# Altium PCB Rigid-QFN-1.PcbDoc (part 1 of 2)
Units mil, origin at the board's own origin, x right, y up, seen from the top; angles counter-clockwise.
Board outline 1000.01 x 1200 mil, 2 copper layers (Top Layer, Bottom Layer), stack 0.552 mil thick; 55 components, 23 nets, 162 pads, 82 vias.
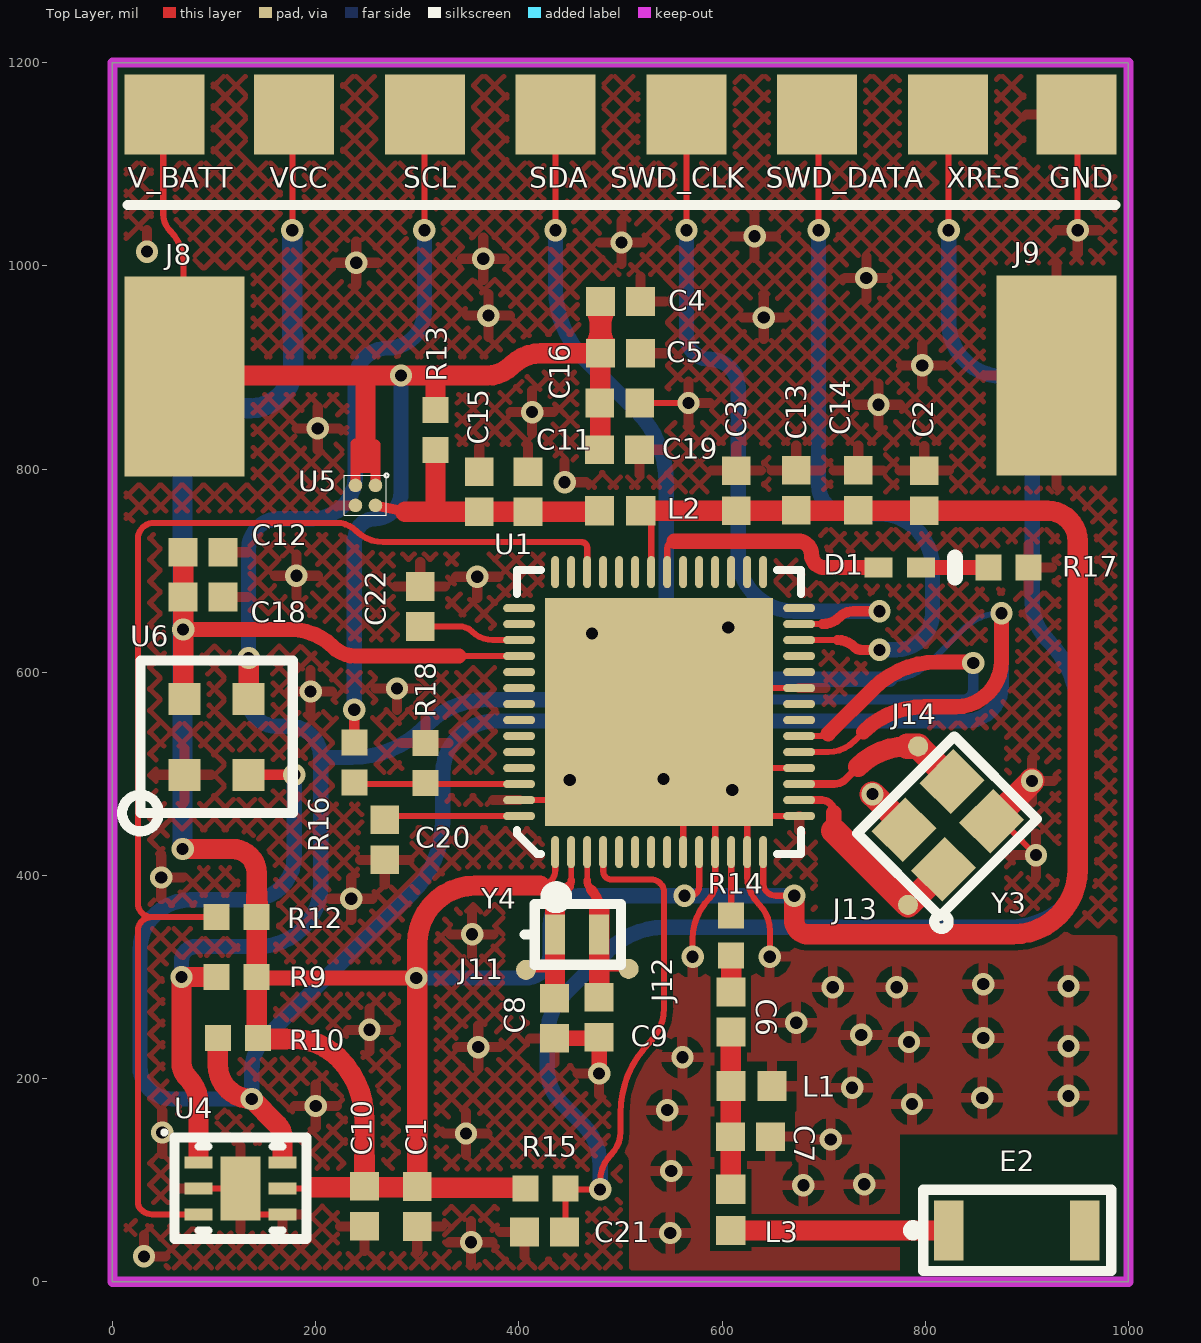
[diagram p0: Top Layer view]
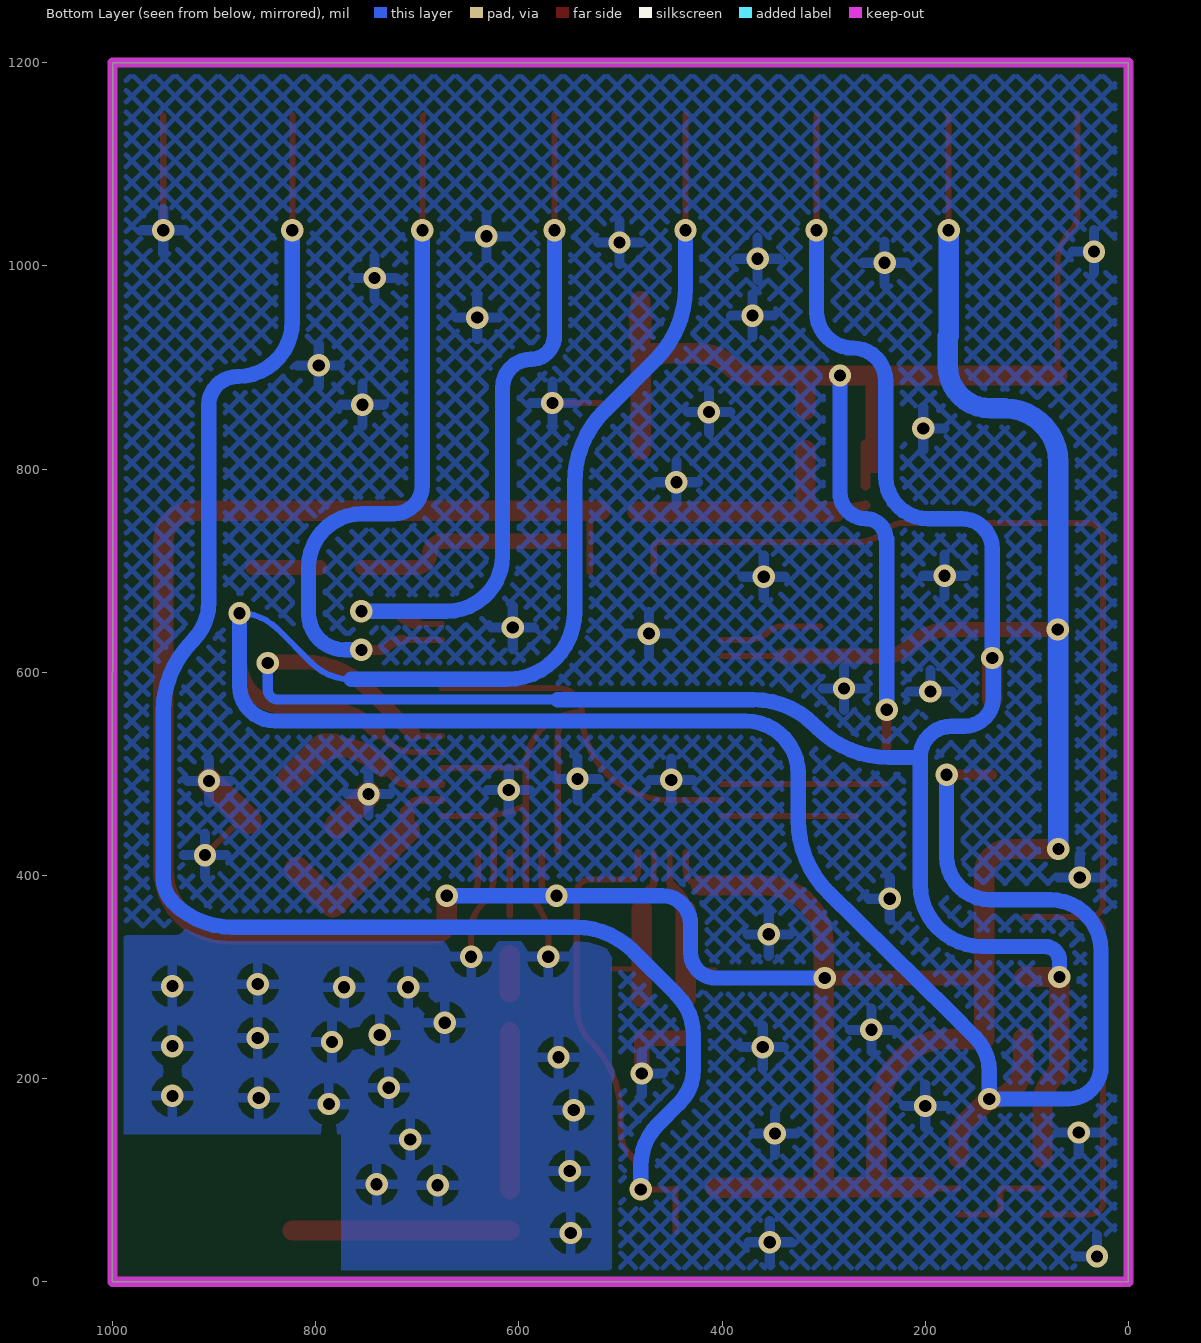
[diagram p1: Bottom Layer view, seen from below]

## Layer stack, top to bottom
Top Solder: solder mask 0.4, Solder Resist, Dk 3.5
Top Layer: signal copper 0.04
Dielectric1: dielectric 0.472, Polyimide, Dk 2.93
Bottom Layer: signal copper 0.04
Bottom Solder: solder mask 0.4, Solder Resist, Dk 3.5

## Board outline
0,0 1000.01,0 999.92,1200 0,1200

## Design rules (kind name [scope] priority, off if disabled: settings)
Clearance "pour clearance" [All] p1: gap=6 ignorepadtopadclearanceinfootprint=FALSE
Clearance [All] p2: gap=6 ignorepadtopadclearanceinfootprint=FALSE
ComponentClearance [All] p1: gap=5 collisioncheckmode=3 verticalgap=10 showdistances=FALSE
DiffPairsRouting [All] p1: maxlimit=10 minlimit=5 mostfreqgap=10 toplayer_minwidth=5 toplayer_maxwidth=35 toplayer_prefwidth=7.5 bottomlayer_minwidth=5 bottomlayer_maxwidth=35 bottomlayer_prefwidth=7.5 maxuncoupledlength=500
FabricationTestPointUsage TestPointUsage [All] p1: valid=0 allowmultiple=FALSE
FabricationTestpoint Testpoint [All] p1: side=3 testpointundercomponent=TRUE minsize=40 maxsize=100 preferedsize=60 minholesize=0 maxholesize=40 preferedholesize=32 testpointgrid=1 allowsidetop=TRUE allowsidebottom=TRUE usegrid=TRUE gridtolerance=0.01
HoleSize [All] p1: absolutevalues=TRUE maxlimit=100 minlimit=12 maxpercent=80.000 minpercent=20.000
HoleToHoleClearance [All] p1: gap=16 allowstackedmicrovias=TRUE
MinimumAnnularRing [All] p1: minimumring=5
MinimumSolderMaskSliver [All] p1: minsoldermaskwidth=4
PolygonConnect [All] p1: connectstyle=Relief reliefconductorwidth=10 reliefentries=4 polygonreliefangle="90 Angle" airgapwidth=10
RoutingCorners [All] p1: cornerstyle=45-Degree minsetback=5 maxsetback=30
RoutingVias [All] p1: holewidth=12 width=22 viastyle="Through Hole" minholewidth=6 minwidth=20 maxholewidth=28 maxwidth=25
SilkToSilkClearance [All] p1: silktosilkclearance=6
SilkToSolderMaskClearance SilkscreenOverComponentPads [IsPad] p1: minsilkscreentomaskgap=6 clearancetoexposedcopper=TRUE
SolderMaskExpansion [All] p1: expansion=3
UnRoutedNet [All] p1: checkbadconnections=TRUE
UnpouredPolygon [All] p1: allowshelved=TRUE
Width [All] p1: maxlimit=100 minlimit=6 preferedwidth=6 checkconnectedcopper=TRUE
18 further rules are at their usual default settings.

## Classes and differential pairs
differential pair XTAL_HF: +XTAL_HF_P -XTAL_HF_N
differential pair XTAL_LF: +XTAL_LF_P -XTAL_LF_N

## Components (designator, comment, footprint, x,y, rotation, side; value= is the part's Value field where it differs from the comment)
C1 "100nF" CAP_0402(1005)_M 300,74 r270 top
C2 "10uF" CAP_0402(1005)_M 799,778.68 r90 top
C3 "10uF" CAP_0402(1005)_M 614,778.68 r90 top
C4 "10uF" CAP_0402(1005)_M 500,965 r0 top
C5 "10uF" CAP_0402(1005)_M 500,914 r0 top
C6 "0.5pF" CAP_0402(1005)_M 608.65,265.45 r270 top
C7 "2pF" CAP_0402(1005)_M 628,142.69 r0 top
C8 "39pF" CAP_0402(1005)_M 435,259.32 r270 top
C9 "18pF" CAP_0402(1005)_M 479,260.32 r270 top
C10 "1uF" CAP_0402(1005)_M 248,74.28 r270 top
C11 "1uF" CAP_0402(1005)_M 409,777.68 r90 top
C12 "1uF" CAP_0402(1005)_M 89,718 r0 top
C13 "1uF" CAP_0402(1005)_M 673,779 r90 top
C14 "1uF" CAP_0402(1005)_M 734,779 r90 top
C15 "100nF" CAP_0402(1005)_M 361,777.68 r90 top
C16 "1uF" CAP_0402(1005)_M 499.31,865 r0 top
C18 "100nF" CAP_0402(1005)_M 89,674 r0 top
C19 "1uF" CAP_0402(1005)_M 499,819 r0 top
C20 "1uF" CAP_0402(1005)_M 268,435 r270 top
C21 "100pF" CAP_0402(1005)_M 425.31,49 r180 top
C22 "1uF" CAP_0402(1005)_M 303,664.68 r90 top
D1 "Red" LED_0402(1005) 774,703 r0 top
E2 "2450AT18B100" 2450AT18B100 823,50.69 r0 top
GND "Probe-Pin Pad" Pogo-Pin-Pad 949,1149 r90 top
J8 "Battery_Connector" BATTERY_PAD 71,891 r0 top
J9 "Battery_Connector" BATTERY_PAD 929,892 r0 top
J11 "Probe-CLOCK" POGO-CLOCK-PAD 407,307 r90 top
J12 "Probe-CLOCK" POGO-CLOCK-PAD 508,308 r90 top
J13 "Probe-CLOCK" POGO-CLOCK-PAD 783,371 r180 top
J14 "Probe-CLOCK" POGO-CLOCK-PAD 793,527 r0 top
L1 "2nh" IND_0402(1005)_M 629,192.69 r180 top
L2 "1uh" IND_0402(1005)_M 499.75,759 r0 top
L3 "9nh" IND_0402(1005)_M 608.65,70.77 r270 top
R9 "4.7kR" RES_0402(1005)_M 122.31,300 r0 top
R10 "4.7kR" RES_0402(1005)_M 123.31,240 r0 top
R12 "4.7kR" RES_0402(1005)_M 122.32,359 r180 top
R13 "0mR" RES_0402(1005)_M 318,838.32 r270 top
R14 "0mR" RES_0402(1005)_M 609,341 r270 top
R15 "4.7kR" RES_0402(1005)_M 426.31,92 r0 top
R16 "100kR" RES_0402(1005)_M 238,511 r270 top
R17 "270R" RES_0402(1005)_M 882,703 r0 top
R18 "30kR" RES_0402(1005)_M 308,510.68 r90 top
SCL "Probe-Pin Pad" Pogo-Pin-Pad 307.43,1149 r90 top
SDA "Probe-Pin Pad" Pogo-Pin-Pad 436.14,1149 r90 top
SWD_CLK "Probe-Pin Pad" Pogo-Pin-Pad 564.86,1149 r90 top
SWD_DATA "Probe-Pin Pad" Pogo-Pin-Pad 693.57,1149 r90 top
U1 "CY8C4247LQI-BL483" QFN40P700X700X60-57N 538.13,560.8 r90 top
U4 "TMP116" WSON-6 126,92 r0 top
U5 "ADP172" ADP172 249,774 r270 top locked
U6 "GUVB-C31SM" GUVB-C31SM 102.5,536.4 r180 top
V_BATT "Probe-Pin Pad" Pogo-Pin-Pad 51,1149 r90 top
VCC "Probe-Pin Pad" Pogo-Pin-Pad 178.71,1149 r90 top
XRES "Probe-Pin Pad" Pogo-Pin-Pad 822.29,1149 r90 top
Y3 "ECX-2236" ECX-2236 817.97,406.03 r45 top
Y4 "32.768KHz" ABS05 435.6,342 r0 top

## Footprints (in the part's own frame and the unit in brackets; to place one, negate y for a bottom-side part, rotate by r counter-clockwise, add the part's x,y. Pads: shape width x height; smd on the part's side, far side on the other; paste and mask are expansions set on the pad)
2450AT18B100 [mm] "2.4GHz Mini Antenna SMD, 50 ohm Resistence"
  rect 0.74x1.5 smd mask+0.03: 1(0,0) 2(3.406,0)
  silkscreen extent -1.02,-1.02 4.06,1.02, body extent -0.05,-0.9 3.35,0.9, height 1.4
ABS05 [mm] "32.768 kHz CRYSTAL 12.5 PF +/-20ppm"
  rect 0.5x1 smd mask+0.1: 1(0,0) 2(1.102,0)
  silkscreen extent -0.76,-0.76 1.65,0.76, body extent -0.25,-0.5 1.35,0.5, height 0.5
ADP172 [mm] "4-Ball WLCSP, CB-4-4"
  round 0.34 smd paste+0.01 mask+0.01: A1(-0.25,0.25) A2(0.25,0.25) B1(-0.25,-0.25) B2(0.25,-0.25)
  silkscreen extent -0.55,-0.53 0.5,0.58, body extent -0.48,-0.48 0.48,0.48, height 0.69
BATTERY_PAD [mm]
  rect 3x5 smd: 1(0,0)
CAP_0402(1005)_M [mm] "Chip Capacitor, Body 1.0x0.5mm, Height 0.6mm, IPC Low Density"
  rect 0.72x0.72 smd: 1(-0.5,0) 2(0.5,0)
  body extent -0.55,-0.3 0.55,0.3, height 0.6
ECX-2236 [mm] "48 MHz CRYSTAL 2.5X2.0mm"
  rect 1.2x1.1 smd mask+0.05: 1(0,0) 2(1.7,0) 4(0,1.4)
  rect 1.2x1.1 smd paste+0 mask+0.05: 3(1.7,1.4)
  silkscreen extent -1.14,-1.07 2.54,2.16, body extent -0.36,-0.24 2.14,1.76, height 0.8
GUVB-C31SM [mm]
  rect 0.8x0.8 smd: 1(0.8,0.95) 2(-0.8,0.95) 3(-0.8,-0.95) 4(0.8,-0.95)
  silkscreen extent -1.91,-1.91 2.36,2.36, body extent -1,-1.15 1,1.15, height 1.4
IND_0402(1005)_M [mm] "Chip Inductor, 2-Leads, Body 1.1x0.6mm, IPC Low Density"
  rect 0.73x0.74 smd: 1(-0.515,0) 2(0.515,0)
  body extent -0.55,-0.3 0.55,0.3, height 0.45
LED_0402(1005) [mm] "SMD, 2-Leads, Body 1x0.5mm"
  rect 0.7x0.5 smd: A(-0.508,0) K(0.55,0)
  silkscreen extent 1.4,-0.25 1.4,0.25, body extent -0.5,-0.25 0.5,0.25, height 0.6
POGO-CLOCK-PAD [mm]
  round 0.5 smd: 1(0,0)
Pogo-Pin-Pad [mm]
  rect 2x2 smd: 1(0,0)
QFN40P700X700X60-57N [mm]
  oval 0.8x0.2 smd mask+0: 1(-3.5,2.6) 2(-3.5,2.2) 3(-3.5,1.8) 4(-3.5,1.4) 5(-3.5,1) 6(-3.5,0.6) 7(-3.5,0.2) 8(-3.5,-0.2) 9(-3.5,-0.6) 10(-3.5,-1) 11(-3.5,-1.4) 12(-3.5,-1.8) 13(-3.5,-2.2) 14(-3.5,-2.6) 29(3.5,-2.6) 30(3.5,-2.2) 31(3.5,-1.8) 32(3.5,-1.4) 33(3.5,-1) 34(3.5,-0.6) 35(3.5,-0.2) 36(3.5,0.2) 37(3.5,0.6) 38(3.5,1) 39(3.5,1.4) 40(3.5,1.8) 41(3.5,2.2) 42(3.5,2.6)
  oval 0.2x0.8 smd mask+0: 15(-2.6,-3.5) 16(-2.2,-3.5) 17(-1.8,-3.5) 18(-1.4,-3.5) 19(-1,-3.5) 20(-0.6,-3.5) 21(-0.2,-3.5) 22(0.2,-3.5) 23(0.6,-3.5) 24(1,-3.5) 25(1.4,-3.5) 26(1.8,-3.5) 27(2.2,-3.5) 28(2.6,-3.5) 43(2.6,3.5) 44(2.2,3.5) 45(1.8,3.5) 46(1.4,3.5) 47(1,3.5) 48(0.6,3.5) 49(0.2,3.5) 50(-0.2,3.5) 51(-0.6,3.5) 52(-1,3.5) 53(-1.4,3.5) 54(-1.8,3.5) 55(-2.2,3.5) 56(-2.6,3.5)
  rect 5.7x5.7 smd paste-5.7 mask+0: 57(0,0)
  silkscreen extent -4.83,-3.55 3.55,3.55, body extent -3.55,-3.55 3.55,3.55, height 0.6
RES_0402(1005)_M [mm] "Chip Resistor, 2-Leads, Body 1.05x0.55mm, IPC Low Density"
  rect 0.65x0.65 smd: 1(-0.5,0) 2(0.5,0)
  body extent -0.53,-0.28 0.53,0.28, height 0.4
WSON-6 [mm] "SON, 6-Leads, Body 2x2mm, Pitch 0.65mm, Thermal Pad 1X1.6mm"
  rect 0.7x0.3 smd: 1(-1.05,0.65) 2(-1.05,0) 3(-1.05,-0.65) 4(1.05,-0.65) 5(1.05,0) 6(1.05,0.65)
  rect 1x1.6 smd: 7(0,0)
  silkscreen extent -1.95,-1.27 1.65,1.45, body extent -1,-1 1,1, height 0.8

## Part data
C1 C15 C18: library part C-0402(1005), "___ OHM ___ mW 0402(1005) SMD", Case/Package=0402, Case Code (Metric)=1005, Dielectric=Y5V, Manufacturer=Yageo, Manufacturer Part Number=CC0402ZRY5V6BB104, Max Operating Temperature=85°C, Min Operating Temperature=-30°C, Package Quantity=1, Supplier Part Number 1=311-1422-1-ND, Tolerance=80%, Voltage Rating=10V, Capacitance=100nF, Case Code (Imperial)=0402, ComponentLink1Description=https://datasheet.ciiva.com/176/mlccorderingcode-176345.pdf, ComponentLink1URL=https://datasheet.ciiva.com/176/mlccorderingcode-176345.pdf, ComponentLink2Description=https://datasheet.ciiva.com/176/mlccorderingcode-176346.pdf, ComponentLink2URL=https://datasheet.ciiva.com/176/mlccorderingcode-176346.pdf, ComponentLink3Description=https://datasheet.ciiva.com/176/mlccorderingcode-176347.pdf, ComponentLink3URL=https://datasheet.ciiva.com/176/mlccorderingcode-176347.pdf, ComponentLink4Description=https://datasheet.ciiva.com/13265/upy-gp-np0-16v-to-50v-8-3714-13265323.pdf, ComponentLink4URL=https://datasheet.ciiva.com/13265/upy-gp-np0-16v-to-50v-8-3714-13265323.pdf, Composition=Ceramic, Depth=0.5mm, Description 1="CAP CER 0.1UF 10V Y5V 0402", Halogen Free="Halogen Free", Lead Free="Lead Free", Length=1mm, Mount="Surface Mount", Number of Pins=2, Packaging="Tape and Reel", Pricing 1="1=0.1, 10=0.023, 100=0.0104, 500=0.0075, 1000=0.0059, 2500=0.0053, 5000=0.0049 (USD)", Stock 1=3960, Supplier 1=Digi-Key, Termination=SMD/SMT, Thickness=0.022inch, Voltage Rating (DC)=10V, Weight=2.3E-05oz, Width=0.02inch
C2 C3 C4 C5: library part C-0402(1005), "___ OHM ___ mW 0402(1005) SMD", Case/Package=0402, Case Code (Metric)=1005, Dielectric=X5R, Manufacturer=Murata, Manufacturer Part Number=GRM155R60J106ME15D, Max Operating Temperature=85°C, Min Operating Temperature=-55°C, Supplier Part Number 1=490-13238-1-ND, Tolerance=20%, Voltage Rating=6.3V, Capacitance=10uF, Case Code (Imperial)=0402, ComponentLink1Description=http://search.murata.co.jp/Ceramy/image/img/A01X/partnumbering_e_01.pdf, ComponentLink1URL=http://search.murata.co.jp/Ceramy/image/img/A01X/partnumbering_e_01.pdf, Description 1="10µF 6.3V Ceramic Capacitor X5R 0402 (1005 Metric) 0.039\" L x 0.020\" W (1.00mm x 0.50mm)", Length=0.039inch, Mount="Surface Mount", Packaging="Tape and Reel", Pricing 1="1=0.29, 10=0.196, 100=0.0994, 500=0.068, 1000=0.0602, 2500=0.0576, 5000=0.0523 (USD)", Stock 1=427251, Supplier 1=Digi-Key, Thickness=0.026inch, Voltage Rating (DC)=6.3V, Width=0.02inch
C6: library part C-0402(1005), "___ OHM ___ mW 0402(1005) SMD", Case/Package=0402, Case Code (Metric)=1005, Dielectric=C0G, Manufacturer=Murata, Manufacturer Part Number=GJM1555C1HR50WB01D, Max Operating Temperature=125°C, Min Operating Temperature=-55°C, Package Quantity=10000, Supplier Part Number 1=490-11250-1-ND, Voltage=50V, Capacitance=0.5pF, Case Code (Imperial)=0402, ComponentLink1Description=https://datasheet.ciiva.com/169/product-169683.pdf, ComponentLink1URL=https://datasheet.ciiva.com/169/product-169683.pdf, Depth=0.5mm, Description 1="Multilayer Ceramic Capacitors MLCC - SMD/SMT 0402 0.5pF 50Volts C0G +/-0.05pF", Height=0.5mm, Lead Free="Lead Free", Length=1mm, Mount="Surface Mount", Packaging="Tape and Reel", Pricing 1="1=0.3, 10=0.205, 100=0.1161, 500=0.082, 1000=0.0717, 2500=0.0683, 5000=0.0632 (USD)", Radiation Hardening=No, Stock 1=57275, Supplier 1=Digi-Key, Termination=SMD/SMT, Thickness=0.022inch, Voltage Rating=50V, Voltage Rating (DC)=50V, Width=0.02inch
C7: library part C-0402(1005), "___ OHM ___ mW 0402(1005) SMD", Case/Package=0402, Case Code (Metric)=1005, Dielectric=C0G, Manufacturer=Murata, Manufacturer Part Number=GJM1555C1H2R0BB01D, Max Operating Temperature=125°C, Min Operating Temperature=-55°C, Package Quantity=1, Supplier Part Number 1=490-8091-1-ND, Voltage Rating=50V, Capacitance=2pF, Case Code (Imperial)=0402, ComponentLink1Description=https://datasheet.ciiva.com/5694/1700193-5694978.pdf, ComponentLink1URL=https://datasheet.ciiva.com/5694/1700193-5694978.pdf, ComponentLink2Description=https://datasheet.ciiva.com/16440/l0005e-16440476.pdf, ComponentLink2URL=https://datasheet.ciiva.com/16440/l0005e-16440476.pdf, ComponentLink3Description=https://datasheet.ciiva.com/17453/product-17453487.pdf, ComponentLink3URL=https://datasheet.ciiva.com/17453/product-17453487.pdf, Depth=0.5mm, Description 1="Multilayer Ceramic Capacitors MLCC - SMD/SMT 0402 2.0pF 50Volts C0G +/-0.1pF", Height=0.5mm, Lead Free="Lead Free", Lead Pitch=0.3mm, Length=1mm, Mount="Surface Mount", Number of Pins=2, Packaging="Tape and Reel", Pricing 1="1=0.19, 10=0.13, 100=0.0659, 500=0.0451, 1000=0.0399, 2500=0.0381, 5000=0.0347 (USD)", Radiation Hardening=No, REACH SVHC="No SVHC", Stock 1=103779, Supplier 1=Digi-Key, Termination=SMD/SMT, Thickness=0.022inch, Voltage Rating (DC)=50V, Width=0.5mm
C8: library part C-0402(1005), "___ OHM ___ mW 0402(1005) SMD", Case/Package=0402, Case Code (Metric)=1005, Dielectric=C0G, Manufacturer=KEMET, Manufacturer Part Number=CBR04C390F5GAC, Max Operating Temperature=125°C, Min Operating Temperature=-55°C, Package Quantity=10000, Supplier Part Number 1=399-16083-1-ND, Tolerance=1%, Voltage Rating (DC)=50V, Capacitance=39pF, Case Code (Imperial)=0402, ComponentLink1Description=http://www.mouser.com/ds/2/212/KEM_C1030_CBR_SMD-346920.pdf, ComponentLink1URL=http://www.mouser.com/ds/2/212/KEM_C1030_CBR_SMD-346920.pdf, Description 1="Multilayer Ceramic Capacitors MLCC - SMD/SMT 39pF 50volts 1%", Height=0.5mm, Length=1mm, Packaging="Tape and Reel", Pricing 1="1=0.54, 10=0.374, 100=0.2247, 500=0.1685, 1000=0.1423, 2500=0.1348, 5000=0.1273 (USD)", Stock 1=6320, Supplier 1=Digi-Key, Termination=SMD/SMT, Weight=2.3E-05oz, Width=0.5mm
C9: library part C-0402(1005), "___ OHM ___ mW 0402(1005) SMD", Case/Package=0402, Case Code (Metric)=1005, Dielectric=C0G, Manufacturer=Murata, Manufacturer Part Number=GJM1555C1H180FB01D, Max Operating Temperature=125°C, Min Operating Temperature=-55°C, Package Quantity=10000, Supplier Part Number 1=490-11192-1-ND, Tolerance=1%, Voltage Rating=50V, Capacitance=18pF, Case Code (Imperial)=0402, ComponentLink1Description=https://datasheet.ciiva.com/11607/c02e-11607834.pdf, ComponentLink1URL=https://datasheet.ciiva.com/11607/c02e-11607834.pdf, Depth=0.5mm, Description 1="Multilayer Ceramic Capacitors MLCC - SMD/SMT 0402 18pF 50Volts C0G 1%", Height=0.5mm, Lead Free="Lead Free", Length=1mm, Mount="Surface Mount", Packaging="Tape and Reel", Pricing 1="1=0.24, 10=0.162, 100=0.0822, 500=0.0563, 1000=0.0498, 2500=0.0476, 5000=0.0433 (USD)", Radiation Hardening=No, Stock 1=51032, Supplier 1=Digi-Key, Termination=SMD/SMT, Thickness=0.022inch, Voltage Rating (DC)=50V, Width=0.02inch
C10 C11 C12 C13 C14 C16 C19 C20 C22: library part C-0402(1005), "___ OHM ___ mW 0402(1005) SMD", Case/Package=0402, Case Code (Metric)=1005, Dielectric=X5R, Dielectric Material=Ceramic, Manufacturer=KEMET, Manufacturer Part Number=C0402C105K8PACTU, Max Operating Temperature=85°C, Min Operating Temperature=-55°C, Package Quantity=1, Supplier Part Number 1=399-7765-1-ND, Tolerance=10%, Voltage=10V, Capacitance=1uF, Case Code (Imperial)=0402, ComponentLink1Description=https://datasheet.ciiva.com/7747/40889-7747622.pdf, ComponentLink1URL=https://datasheet.ciiva.com/7747/40889-7747622.pdf, ComponentLink2Description=https://datasheet.ciiva.com/28610/1918694-28610762.pdf, ComponentLink2URL=https://datasheet.ciiva.com/28610/1918694-28610762.pdf, ComponentLink3Description=https://datasheet.ciiva.com/18219/getdatasheetpartid-158224-18219180.pdf, ComponentLink3URL=https://datasheet.ciiva.com/18219/getdatasheetpartid-158224-18219180.pdf, ComponentLink4Description=https://datasheet.ciiva.com/22693/1929483-22693871.pdf, ComponentLink4URL=https://datasheet.ciiva.com/22693/1929483-22693871.pdf, ComponentLink5Description=https://datasheet.ciiva.com/28645/1789732-28645391.pdf, ComponentLink5URL=https://datasheet.ciiva.com/28645/1789732-28645391.pdf, Contact Plating=Tin,Matte, Depth=0.5mm, Description 1="Cap Ceramic 1uF 10V X5R 10% SMD 0402 85C T/R", Dissipation Factor=5%, Height=0.5mm, Lead Free="Lead Free", Length=1mm, Mount="Surface Mount,PCB", Number of Pins=2, Packaging="Tape and Reel", Pricing 1="1=0.13, 10=0.093, 100=0.0416, 500=0.0297, 1000=0.0233, 2500=0.0212, 5000=0.0195 (USD)", Radiation Hardening=No, REACH SVHC="No SVHC", Stock 1=0, Supplier 1=Digi-Key, Termination=SMD/SMT, Thickness=0.022inch, Voltage Rating=10V, Voltage Rating (DC)=10V, Width=0.02inch
C21: library part C-0402(1005), "___ OHM ___ mW 0402(1005) SMD", Case/Package=0402, Case Code (Metric)=1005, Manufacturer="Wurth Electronics", Manufacturer Part Number=885012005013, Max Operating Temperature=125°C, Min Operating Temperature=-55°C, Supplier Part Number 1=732-7431-1-ND, Tolerance=5%, Voltage Rating=10V, Capacitance=100pF, Case Code (Imperial)=0402, Description 1="100pF 10V Ceramic Capacitor C0G, NP0 0402 (1005 Metric) 0.039\" L x 0.020\" W (1.00mm x 0.50mm)", Length=0.039inch, Mount="Surface Mount", Packaging="Tape and Reel", Pricing 1="1=0.1, 10=0.017, 100=0.0152, 500=0.0134 (USD)", Stock 1=12906, Supplier 1=Digi-Key, Thickness=0.022inch, Width=0.02inch
D1: library part LED_0402(1005), "LED, 0402(1005) SMD", Case/Package=0402, Case Code (Metric)=1005, Forward Current=20mA, Forward Voltage=1.95V, Lens Colour=Clear, Manufacturer=Kingbright, Manufacturer Part Number=APHHS1005SURCK, Max Operating Temperature=85°C, Min Operating Temperature=-40°C, Package Quantity=2000, Supplier Part Number 1=754-1104-1-ND, Case Code (Imperial)=0402, Colour=Red, ComponentLink1Description=https://datasheet.ciiva.com/14603/70062833-14603899.pdf, ComponentLink1URL=https://datasheet.ciiva.com/14603/70062833-14603899.pdf, ComponentLink2Description=https://datasheet.ciiva.com/2114/aphhs1005surck-2114140.pdf, ComponentLink2URL=https://datasheet.ciiva.com/2114/aphhs1005surck-2114140.pdf, ComponentLink3Description=https://datasheet.ciiva.com/4689/aphhs1005surck-32322-4689068.pdf, ComponentLink3URL=https://datasheet.ciiva.com/4689/aphhs1005surck-32322-4689068.pdf, ComponentLink4Description=https://datasheet.ciiva.com/2114/aphhs1005surck-2114141.pdf, ComponentLink4URL=https://datasheet.ciiva.com/2114/aphhs1005surck-2114141.pdf, ComponentLink5Description=https://datasheet.ciiva.com/2114/aphhs1005surck-2114142.pdf, ComponentLink5URL=https://datasheet.ciiva.com/2114/aphhs1005surck-2114142.pdf, Description 1="LED 1X0.5MM 630NM RD WTR CLR SMD", Dominant Wavelength=630nm, Height=0.6mm, Illumination Colour=Red, Lead Free="Lead Free", Length=1mm, Lens Style=Flat,Clear, Luminous Intensity=220mcd, Mount="Surface Mount", Number of LEDs=1, Number of Pins=2, Packaging="Tape and Reel", Pricing 1="1=0.44, 10=0.318, 25=0.2596, 100=0.2077, 250=0.1752, 500=0.1493, 1000=0.1168 (USD)", Stock 1=195639, Supplier 1=Digi-Key, Test Current=20mA, Viewing Angle=120°, Wavelength=635nm, Width=0.5mm
E2: "2.4 GHz BLE Antenna", Case/Package=CSMD, Frequency=2.45GHz, Manufacturer=Johanson, Manufacturer Part Number=2450AT18B100E, Max Frequency=2.5GHz, Max Power Dissipation=3W, Package Quantity=1, Supplier Part Number 1=712-1006-1-ND, Bandwidth=100MHz, ComponentLink1Description=https://datasheet.ciiva.com/1124/1318299-1124918.pdf, ComponentLink1URL=https://datasheet.ciiva.com/1124/1318299-1124918.pdf, ComponentLink2Description=https://datasheet.ciiva.com/24025/antenna-2450at18b100-242422-24025839.pdf, ComponentLink2URL=https://datasheet.ciiva.com/24025/antenna-2450at18b100-242422-24025839.pdf, Contact Plating=Tin, Description 1="JOHANSON TECHNOLOGY         2450AT18B100E             ANTENNA, CERAMIC, 2.45GHZ", Gain=-0.5dB, Height=0.051inch, Impedance=50R, Length=3.2mm, Mount="Surface Mount", Number of Bands=1, Packaging="Tape and Reel", Power Rating=3W, Pricing 1="1=0.62, 10=0.541, 25=0.4788, 100=0.4172, 250=0.3631, 500=0.309, 1000=0.2472 (USD)", REACH SVHC="No SVHC", Return Loss=-9.5dB, Stock 1=187598, Supplier 1=Digi-Key, Termination=Solder, Width=1.6mm
L1: library part I-0402(1005), Case/Package=0402, Case Code (Metric)=1005, Current Rating=1.04A, DC Resistance (DCR)=70mR, Manufacturer=Abracon, Manufacturer Part Number=AISC-0402-2N0J-T, Max Operating Temperature=125°C, Min Operating Temperature=-40°C, Package Quantity=10000, Self Resonant Frequency=11.1GHz, Supplier Part Number 1=535-10424-6-ND, Test Frequency=250MHz, Tolerance=5%, Case Code (Imperial)=0402, ComponentLink1Description=https://datasheet.ciiva.com/1054/aisc-0402-1054032.pdf, ComponentLink1URL=https://datasheet.ciiva.com/1054/aisc-0402-1054032.pdf, ComponentLink2Description=https://datasheet.ciiva.com/26928/getdatasheetpartid-762366-26928064.pdf, ComponentLink2URL=https://datasheet.ciiva.com/26928/getdatasheetpartid-762366-26928064.pdf, ComponentLink3Description=https://datasheet.ciiva.com/11140/aisc-0402-11140262.pdf, ComponentLink3URL=https://datasheet.ciiva.com/11140/aisc-0402-11140262.pdf, ComponentLink4Description=https://datasheet.ciiva.com/1054/aisc-0402-1054030.pdf, ComponentLink4URL=https://datasheet.ciiva.com/1054/aisc-0402-1054030.pdf, ComponentLink5Description=https://datasheet.ciiva.com/1054/aisc-0402-1054031.pdf, ComponentLink5URL=https://datasheet.ciiva.com/1054/aisc-0402-1054031.pdf, Composition=Wirewound,Ceramic, Core Material=Ceramic, DC Current=1.04A, Depth=0.64mm, Description 1="2nH Unshielded Wirewound Inductor 1.04A 70 mOhm Max 0402 (1005 Metric)", Height=0.66mm, Height - Seated (Max)=0.026inch, Inductance=2nh, Length=1.19mm, Max DC Current=1.04A, Military Standard=Not, Mount="Surface Mount", Number of Pins=2, Packaging="Tape and Reel", Pricing 1="1=0.33, 10=0.297, 25=0.264, 50=0.231, 100=0.2145, 500=0.1881, 750=0.1716, 1000=0.1518 (USD)", Q Factor=16, Radiation Hardening=No, Shielding=Unshielded, Stock 1=5165, Supplier 1=Digi-Key, Termination=SMD/SMT, Width=0.025inch
L2: library part "Inductor Iron", "Magnetic-Core Inductor", Case/Package=0402, Case Code (Metric)=1005, Current Rating=450mA, DC Resistance (DCR)=455mR, Manufacturer=TDK, Manufacturer Part Number=MLZ1005M1R0WT000, Max Operating Temperature=125°C, Min Operating Temperature=-55°C, Package Quantity=10000, Saturation Current=100mA, Self Resonant Frequency=170MHz, Supplier Part Number 1=445-6379-1-ND, Test Frequency=2MHz, Tolerance=20%, Case Code (Imperial)=0402, ComponentLink1Description=https://datasheet.ciiva.com/29699/inductor-commercial-decoupling-mlz-en-29699052.pdf, ComponentLink1URL=https://datasheet.ciiva.com/29699/inductor-commercial-decoupling-mlz-en-29699052.pdf, ComponentLink2Description=https://datasheet.ciiva.com/29699/inductor-commercial-decoupling-mlz-en-29699053.pdf, ComponentLink2URL=https://datasheet.ciiva.com/29699/inductor-commercial-decoupling-mlz-en-29699053.pdf, Core Material=Ferrite, Description 1="FIXED IND 1UH 450MA 350 MOHM SMD", Height - Seated (Max)=0.022inch, Inductance=1uh, Length=0.039inch, Mount="Surface Mount", Packaging="Tape and Reel", Pricing 1="1=0.29, 10=0.258, 100=0.1771, 500=0.1513, 1000=0.1159, 2500=0.1095 (USD)", Shielding=Shielded, Stock 1=22743, Supplier 1=Digi-Key, Width=0.02inch
L3: library part I-0402(1005), Case/Package=0402, Current Rating=1.42A, DC Resistance (DCR)=70mR, Manufacturer=Murata, Manufacturer Part Number=LQW15AN9N0G80D, Max Operating Temperature=125°C, Min Operating Temperature=-55°C, Self Resonant Frequency=6.5GHz, Supplier Part Number 1=490-14715-1-ND, Test Frequency=100MHz, Tolerance=2%, Composition=Wirewound, Description 1="9nH Unshielded Wirewound Inductor 1.42A 70 mOhm Max 0402 (1005 Metric)", Height - Seated (Max)=0.024inch, Inductance=9nh, Length=0.039inch, Mount="Surface Mount", Packaging="Tape and Reel", Pricing 1="1=0.25, 10=0.221, 100=0.1518, 500=0.1297, 1000=0.0994, 2500=0.0938 (USD)", Shielding=Unshielded, Stock 1=3213, Supplier 1=Digi-Key, Width=0.024inch
R9 R10 R12 R15: library part R-0402(1005), "___ OHM ___ mW 0402(1005) SMD", Case/Package=0402, Case Code (Metric)=1005, Manufacturer=Yageo, Manufacturer Part Number=RC0402JR-074K7P, Max Operating Temperature=155°C, Max Power Dissipation=63mW, Min Operating Temperature=-55°C, Supplier Part Number 1=YAG1287CT-ND, Temperature Coefficient=150ppm/°C, Tolerance=5%, Case Code (Imperial)=0402, ComponentLink1Description=http://www.yageo.com.tw/exep/pages/download/literatures/PYu-R_INT-thick_7.pdf, ComponentLink1URL=http://www.yageo.com.tw/exep/pages/download/literatures/PYu-R_INT-thick_7.pdf, Composition="Thick Film", Description 1="RES SMD 4.7K OHM 5% 1/16W 0402", Height=0.016inch, Length=0.039inch, Number of Terminations=2, Packaging="Tape and Reel", Pricing 1="1=0.1, 10=0.019, 100=0.0075, 1000=0.0034, 2500=0.0029, 5000=0.0024 (USD)", Resistance=4.7kR, Stock 1=48445, Supplier 1=Digi-Key, Width=0.02inch
R13 R14: library part R-0402(1005), "___ OHM ___ mW 0402(1005) SMD", Case/Package=0402, Case Code (Metric)=1005, Manufacturer=Yageo, Manufacturer Part Number=AC0402JR-070RL, Max Operating Temperature=155°C, Max Power Dissipation=63mW, Min Operating Temperature=-55°C, Package Quantity=1, Power Rating=62.5mW, Supplier Part Number 1=311-0.0LBCT-ND, Temperature Coefficient=200ppm/°C, Tolerance=5%, Voltage Rating=50V, Case Code (Imperial)=0402, ComponentLink1Description=http://www.mouser.com/ds/2/447/yageodocoutput-1111992.pdf, ComponentLink1URL=http://www.mouser.com/ds/2/447/yageodocoutput-1111992.pdf, ComponentLink2Description=http://www.yageo.com/NewPortal/yageodocoutput?fileName=/pdf/R-Chip/PYu-AC_51_RoHS_L_6.pdf, ComponentLink2URL=http://www.yageo.com/NewPortal/yageodocoutput?fileName=/pdf/R-Chip/PYu-AC_51_RoHS_L_6.pdf, ComponentLink3Description=http://www.yageo.com/documents/recent/PYu-AC_51_RoHS_L_2_revised.pdf, ComponentLink3URL=http://www.yageo.com/documents/recent/PYu-AC_51_RoHS_L_2_revised.pdf, Composition="Thick Film", Description 1="RES SMD 0.0OHM JUMPER 1/16W 0402", Height=0.015inch, Lead Free="Lead Free", Length=0.039inch, Number of Terminations=2, Packaging="Tape and Reel", Pricing 1="1=0.1, 10=0.019, 25=0.014, 50=0.0108, 100=0.0079, 250=0.006, 500=0.0048, 1000=0.0036, 5000=0.0026 (USD)", Resistance=0mR, Stock 1=4, Supplier 1=Digi-Key, Termination=SMD/SMT, Width=0.02inch
R16: library part R-0402(1005), "___ OHM ___ mW 0402(1005) SMD", Case/Package=0402, Case Code (Metric)=1005, Manufacturer=Yageo, Manufacturer Part Number=AC0402JR-07100KL, Max Operating Temperature=155°C, Max Power Dissipation=63mW, Min Operating Temperature=-55°C, Power Rating=62.5mW, Supplier Part Number 1=YAG3515CT-ND, Temperature Coefficient=100ppm/°C, Tolerance=5%, Voltage Rating=50V, Case Code (Imperial)=0402, ComponentLink1Description=https://datasheet.ciiva.com/26862/getdatasheetpartid-553131-26862451.pdf, ComponentLink1URL=https://datasheet.ciiva.com/26862/getdatasheetpartid-553131-26862451.pdf, Composition="Thick Film", Depth=0.5mm, Description 1="Thick Film Resistors - SMD 1/16W 100K ohm 5%", Height=0.015inch, Lead Free="Lead Free", Length=1mm, Military Standard=Not, Number of Terminations=2, Packaging="Tape and Reel", Pricing 1="1=0.1, 10=0.02, 100=0.0082, 1000=0.0037, 2500=0.0032, 5000=0.0026 (USD)", Resistance=100kR, Stock 1=136750, Supplier 1=Digi-Key, Termination=SMD/SMT, Width=0.5mm
R17: library part R-0402(1005), "___ OHM ___ mW 0402(1005) SMD", Case/Package=0402, Case Code (Metric)=1005, Manufacturer=Yageo, Manufacturer Part Number=RC0402JR-07270RL, Max Operating Temperature=155°C, Max Power Dissipation=63mW, Min Operating Temperature=-55°C, Package Quantity=1, Power Rating=62.5mW, Supplier Part Number 1=311-270JRCT-ND, Temperature Coefficient=100ppm/°C, Tolerance=5%, Voltage Rating=50V, Case Code (Imperial)=0402, ComponentLink1Description=https://datasheet.ciiva.com/7850/1018594-7850184.pdf, ComponentLink1URL=https://datasheet.ciiva.com/7850/1018594-7850184.pdf, ComponentLink2Description=https://datasheet.ciiva.com/2518/pyu-r-int-thick-7-2518937.pdf, ComponentLink2URL=https://datasheet.ciiva.com/2518/pyu-r-int-thick-7-2518937.pdf, ComponentLink3Description=https://datasheet.ciiva.com/7850/1018594-7850185.pdf, ComponentLink3URL=https://datasheet.ciiva.com/7850/1018594-7850185.pdf, ComponentLink4Description=https://datasheet.ciiva.com/2518/pyu-r-int-thick-7-2518938.pdf, ComponentLink4URL=https://datasheet.ciiva.com/2518/pyu-r-int-thick-7-2518938.pdf, ComponentLink5Description=https://datasheet.ciiva.com/12558/pyu-rc0402-51-rohs-l-6-r-8721-12558282.pdf, ComponentLink5URL=https://datasheet.ciiva.com/12558/pyu-rc0402-51-rohs-l-6-r-8721-12558282.pdf, ComponentLink6Description=https://datasheet.ciiva.com/16740/pyu-rc0402-51-rohs-l-6-r-16740906.pdf, ComponentLink6URL=https://datasheet.ciiva.com/16740/pyu-rc0402-51-rohs-l-6-r-16740906.pdf, ComponentLink7Description=https://datasheet.ciiva.com/2518/pyu-r-int-thick-7-2518939.pdf, ComponentLink7URL=https://datasheet.ciiva.com/2518/pyu-r-int-thick-7-2518939.pdf, Composition="Thick Film", Depth=0.5mm, Description 1="RES SMD 270 OHM 5% 1/16W 0402", Height=0.016inch, Lead Free="Lead Free", Length=1mm, Military Standard=Not, Number of Terminations=2, Packaging="Tape and Reel", Pricing 1="1=0.1, 10=0.012, 100=0.005, 1000=0.0022, 2500=0.0019, 5000=0.0016 (USD)", REACH SVHC=Unknown, Resistance=270R, Stock 1=176696, Supplier 1=Digi-Key, Termination=SMD/SMT, Width=0.02inch, Working Voltage=50V
R18: library part R-0402(1005), "___ OHM ___ mW 0402(1005) SMD", Case/Package=0402, Case Code (Metric)=1005, Manufacturer=Yageo, Manufacturer Part Number=RC0402JR-0730KL, Max Operating Temperature=155°C, Max Power Dissipation=63mW, Min Operating Temperature=-55°C, Package Quantity=10000, Power Rating=62.5mW, Supplier Part Number 1=311-30KJRCT-ND, Temperature Coefficient=100ppm/°C, Tolerance=5%, Voltage Rating=50V, Case Code (Imperial)=0402, ComponentLink1Description=https://datasheet.ciiva.com/2491/pyu-r-int-thick-7-2491204.pdf, ComponentLink1URL=https://datasheet.ciiva.com/2491/pyu-r-int-thick-7-2491204.pdf, ComponentLink2Description=https://datasheet.ciiva.com/7983/1018594-7983575.pdf, ComponentLink2URL=https://datasheet.ciiva.com/7983/1018594-7983575.pdf, ComponentLink3Description=https://datasheet.ciiva.com/16863/pyu-rc0402-51-rohs-l-6-16863162.pdf, ComponentLink3URL=https://datasheet.ciiva.com/16863/pyu-rc0402-51-rohs-l-6-16863162.pdf, ComponentLink4Description=https://datasheet.ciiva.com/28401/pyu-rc0402-51-rohs-l-6-28401244.pdf, ComponentLink4URL=https://datasheet.ciiva.com/28401/pyu-rc0402-51-rohs-l-6-28401244.pdf, ComponentLink5Description=https://datasheet.ciiva.com/12577/pyu-rc0402-51-rohs-l-6-r-12577407.pdf, ComponentLink5URL=https://datasheet.ciiva.com/12577/pyu-rc0402-51-rohs-l-6-r-12577407.pdf, Composition="Thick Film", Contact Plating=Tin,Matte, Depth=0.5mm, Description 1="RES SMD 30K OHM 5% 1/16W 0402", Height=0.016inch, Lead Free="Lead Free", Length=1mm, Military Standard=Not, Number of Pins=2, Number of Terminations=2, Packaging="Tape and Reel", Pricing 1="1=0.1, 10=0.012, 100=0.005, 1000=0.0022, 2500=0.0019, 5000=0.0016 (USD)", Radiation Hardening=No, Resistance=30kR, Stock 1=666192, Supplier 1=Digi-Key, Termination=SMD/SMT, Voltage Rating (DC)=50V, Weight=2.3E-05oz, Width=0.02inch, Working Voltage=50V
U1: Case/Package="QFN EP", Frequency=48MHz, Manufacturer=Cypress, Manufacturer Part Number=CY8C4245LQI-483, Max Operating Temperature=85°C, Max Supply Voltage=5.5V, Min Operating Temperature=-40°C, Min Supply Voltage=1.71V, Operating Supply Voltage=1.8V, Package Quantity=490, Supplier Part Number 1=CY8C4245LQI-483-ND, ComponentLink1Description=https://datasheet.ciiva.com/26911/getdatasheetpartid-718692-26911745.pdf, ComponentLink1URL=https://datasheet.ciiva.com/26911/getdatasheetpartid-718692-26911745.pdf, ComponentLink2Description=https://datasheet.ciiva.com/22658/1699500-22658213.pdf, ComponentLink2URL=https://datasheet.ciiva.com/22658/1699500-22658213.pdf, ComponentLink3Description=https://datasheet.ciiva.com/16431/001-87197-16431545.pdf, ComponentLink3URL=https://datasheet.ciiva.com/16431/001-87197-16431545.pdf, ComponentLink4Description=https://datasheet.ciiva.com/30028/001-87197-30028665.pdf, ComponentLink4URL=https://datasheet.ciiva.com/30028/001-87197-30028665.pdf, Contact Plating=Nickel,Gold, Core Architecture=ARM, Data Bus Width=32b, Description 1="IC MCU 32BIT 32KB FLASH 40QFN", Interface=I2C,SPI,UART, Lead Free="Lead Free", Max Frequency=48MHz, Memory Size=32KB, Memory Type=SRAM,FLASH, Mount="Surface Mount", Number of I/Os=34, Number of Pins=40, Number of Timers/Counters=4, Packaging=Tray, Peripherals=PWM,I2C, Pricing 1="1=4.28, 10=3.825, 25=3.4424, 100=3.1365, 250=2.8305, 500=2.5398, 1000=2.142, 2500=2.0349, 5000=1.9584 (USD)", Radiation Hardening=No, RAM Size=4KB, REACH SVHC="No SVHC", Stock 1=11906, Supplier 1=Digi-Key, Watchdog Timer=Yes, Weight=0.004138oz
U4: "TI Digital I2C Temperature Sensor", Manufacturer="Texas Instruments", Manufacturer Part Number=TMP116AIDRVT, Max Operating Temperature=150°C, Min Operating Temperature=-55°C, Supplier Part Number 1=296-46944-1-ND, Interface=I2C,SMBus,2-Wire, Pricing 1="1=4.01, 10=3.599, 100=2.9485 (USD)", Stock 1=995, Supplier 1=Digi-Key
U5: "3V LDO", Dropout Voltage=50mV, Manufacturer="Analog Devices", Manufacturer Part Number=ADP172ACBZ-3.0-R7, Max Input Voltage=3.6V, Max Operating Temperature=125°C, Max Output Current=300mA, Max Output Voltage=3V, Max Supply Current=170uA, Min Current Limit=400mA, Min Input Voltage=1.6V, Min Operating Temperature=-40°C, Min Output Voltage=800mV, Nominal Supply Current=23uA, Package Quantity=3000, Power Supply Rejection Ratio (PSRR)=73dB, Quiescent Current=60uA, Supplier Part Number 1=ADP172ACBZ-3.0-R7CT-ND, ComponentLink1Description=https://datasheet.ciiva.com/2056/adp172-2056690.pdf, ComponentLink1URL=https://datasheet.ciiva.com/2056/adp172-2056690.pdf, ComponentLink2Description=https://datasheet.ciiva.com/2056/adp172-2056691.pdf, ComponentLink2URL=https://datasheet.ciiva.com/2056/adp172-2056691.pdf, ComponentLink3Description=https://datasheet.ciiva.com/2056/adp172-2056692.pdf, ComponentLink3URL=https://datasheet.ciiva.com/2056/adp172-2056692.pdf, ComponentLink4Description=https://datasheet.ciiva.com/3224/adp172-3224693.pdf, ComponentLink4URL=https://datasheet.ciiva.com/3224/adp172-3224693.pdf, ComponentLink5Description=https://datasheet.ciiva.com/17365/adp172-17365245.pdf, ComponentLink5URL=https://datasheet.ciiva.com/17365/adp172-17365245.pdf, ComponentLink6Description=https://datasheet.ciiva.com/48694/001251525-da-01-en-ic-reg-ldo-adp172acbz-3-0-r7-wlcsp-4-adi-48694412.pdf, ComponentLink6URL=https://datasheet.ciiva.com/48694/001251525-da-01-en-ic-reg-ldo-adp172acbz-3-0-r7-wlcsp-4-adi-48694412.pdf, Contact Plating=Copper,Tin,Silver, Description 1="Linear Voltage Regulator IC Positive Fixed 1 Output 3V 300mA 4-WLCSP (0.95x1.03)", Lead Free="Contains Lead", Mount="Surface Mount", Number of Outputs=1, Number of Pins=4, Number of Regulators=1, Operating Supply Current=23uA, Output Current=300mA, Output Voltage=3V, Packaging="Tape and Reel", Polarity=Positive, Pricing 1="1=1.13, 10=1.013, 100=0.7896, 500=0.6523, 1000=0.515 (USD)", Radiation Hardening=No, Stock 1=438, Supplier 1=Digi-Key
Y3: "24 MHz Crystal", Case/Package=SMD/SMT, ESR (Equivalent Series Resistance)=60R, Frequency=24MHz, Frequency Stability=10ppm, Load Capacitance=8pF, Manufacturer="ECS International", Manufacturer Part Number=ECS-240-8-36CKM-TR, Max Operating Temperature=70°C, Min Operating Temperature=-20°C, Package Quantity=1000, Supplier Part Number 1=XC1557CT-ND, ComponentLink1Description=http://www.ecsxtal.com/store/pdf/partnumber4.pdf, ComponentLink1URL=http://www.ecsxtal.com/store/pdf/partnumber4.pdf, ComponentLink2Description=http://www.mouser.com/ds/2/122/ECX-2236-15751.pdf, ComponentLink2URL=http://www.mouser.com/ds/2/122/ECX-2236-15751.pdf, Description 1="Crystals 24MHz 10ppm", Frequency Tolerance=10ppm, Height=0.026inch, Length=0.098inch, Mount="Surface Mount", Packaging="Tape and Reel", Pricing 1="1=1.12, 10=0.987, 50=0.9224, 100=0.8151, 500=0.7722 (USD)", Stock 1=30313, Supplier 1=Digi-Key, Termination=SMD/SMT, Tolerance=10ppm, Width=0.079inch
Y4: library part ABS05, "Crystal Oscillator", Case/Package=SMD/SMT, ESR (Equivalent Series Resistance)=90kR, Frequency=32.768kHz, Frequency Tolerance=20ppm, Load Capacitance=12.5pF, Manufacturer=Abracon, Manufacturer Part Number=ABS05-32.768KHZ-T, Max Operating Temperature=85°C, Min Operating Temperature=-40°C, Package Quantity=3000, Supplier Part Number 1=535-11899-1-ND, ComponentLink1Description=https://datasheet.ciiva.com/23810/abs05-23810480.pdf, ComponentLink1URL=https://datasheet.ciiva.com/23810/abs05-23810480.pdf, ComponentLink2Description=https://datasheet.ciiva.com/6728/abs05-6728949.pdf, ComponentLink2URL=https://datasheet.ciiva.com/6728/abs05-6728949.pdf, ComponentLink3Description=https://datasheet.ciiva.com/6728/abs05-6728950.pdf, ComponentLink3URL=https://datasheet.ciiva.com/6728/abs05-6728950.pdf, ComponentLink4Description=https://datasheet.ciiva.com/16411/abs05-16411149.pdf, ComponentLink4URL=https://datasheet.ciiva.com/16411/abs05-16411149.pdf, Depth=1mm, Description 1="32.768kHz ±20ppm Crystal 12.5pF 90 kOhm -40°C ~ 85°C  Surface Mount 2-SMD", Height=0.02inch, Lead Free="Lead Free", Length=1.6mm, Mount="Surface Mount", Number of Pins=2, Packaging="Tape and Reel", Pricing 1="1=1.03, 10=0.911, 50=0.8514, 100=0.7524, 500=0.7128, 1000=0.594 (USD)", Radiation Hardening=No, REACH SVHC="No SVHC", Series Resistance=90kR, Stock 1=92285, Supplier 1=Digi-Key, Termination=SMD/SMT, Tolerance=20ppm, Width=0.039inch

## Via types
v1: diameter 22, hole 12, Top Layer to Bottom Layer, 82 vias

## Nets (pads, with @x,y where several pads share a name; then routed paths per layer and width w, separated by ;. In a path a pad name is that pad's centre, name@x,y a point inside that pad or via, vN(x,y) a via of type N, cw(c..) or ccw(c..) an arc to the next point about the centre after c; other vN are vias at no path point)
ALERT: R12.2 U1.40 U4.3 | length 1281.9
  Top Layer w6: U4.3 39.08,66.41 cw(c39.08,82.08) 28,71 cw(c35.24,78.24) 25,78.24 25,345.34 cw(c38.66,345.34) 29,355 cw(c38.66,345.34) 38.66,359 ; R12.2 38.66,359 ; U1.40 467.27,722.73 ccw(c462,722.73) 462,728 266.56,728 cw(c266.56,765.56) 240,739 ccw(c220.69,719.69) 220.69,747 41,747 ccw(c41,731) 25,731 25,372.66 ccw(c38.66,372.66) 38.66,359
ANTENNA: R14.1 U1.12 | length 62.3
  Top Layer w6: R14.1 U1.12
BATTERY_LEVEL: R16.2 R18.1 U1.54 | length 161.4
  Top Layer w6: R16.2@239,490 239,489.93 U1.54
GND: C1.2 C2.2 C3.2 C4.2 C5.2 C7.2 C8.2 C9.2 C10.2 C11.2 C12.2 C13.2 C14.2 C15.2 C16.2 C18.2 C19.2 C20.2 C21.2 C22.2 GND.1 J9.1 L1.1 R17.2 R18.2 U1.9 U1.11 U1.13 U1.15 U1.18 U1.23 U1.55 U1.57 U4.2 U4.4 U4.7 U5.B2 U6.1 Y3.2 Y3.4 | length 1589.8
  Top Layer w5: GND.1@950,1148 GND.1@951,1149
  Top Layer w6: U4.2 U4.7 126,71 130.59,66.41 U4.4 ; U1.55 451.52,474.18 ccw(c451.52,560.8) U1.57 ; C9.2@478,239.63 ccw(c478,240.63) C9.2 ; C16.2 v1(567,865) ; U1.9 561.76,537.17 ccw(c538.13,537.17) U1.57 ; v1(571,320) 571,337.14 cw(c628.67,337.14) 587.89,377.92 ccw(c573.1,391.6) 593.25,391.6 U1.11 U1.57@593.25,469.07 ; v1(647,320) 647,345.44 ccw(c609.44,345.44) 636,372 cw(c663.16,399.16) 624.75,399.16 U1.13 U1.57@624.75,459.33 ; U1.15 638.13,458.43 cw(c638.13,558.43) U1.57@624.75,459.33 ; U1.18 U1.57@593.25,505.68 ; U1.23 561.76,584.42 ccw(c561.76,560.8) U1.57 ; Y3.4 Y3.4@779,449 ; Y3.2 cw(c865.3,428.37) 882.97,446.03 v1(909,420) ; v1@904.95,493 v1(905,493) ; v1@950,1034 GND.1@950,1148 ; U1.57 cw(c538.13,505.68) U1.57@593.25,505.68 ; U1.57@593.25,469.07 ccw(c638.13,558.43) U1.57@624.75,459.33 ; U1.57@593.25,469.07 U1.57@593.25,505.68
  Top Layer w15: C8.2 C9.2@478,239.63 ; v1(479,205) C9.2
  Top Layer w25: v1(748,480) Y3.4@779,449 ; Y3.2 v1@904.95,493
  other v1: 31,25 353,39 549,48 680,95 740,96 550,109 707,140 348,146 49,147 546,169 200,173 787,175 856,181 941,183 728,191 561,221 360,231 941,232 784,236 857,240 737,243 253,248 673,255 709,290 772,290 941,291 857,293 354,342 235,377 48,398 610,484 450,494 542.24,495 195,581 280,584 472,638 606,644 359,694 181,695 445,787 202,840 413,856 754,863.29 797,902 641,949 370,951 742,988 240,1003 365,1007 34,1014 501,1023 632,1029 950,1035
LED_RED: D1.A U1.35 | length 250.2
  Top Layer w6: U1.35 546.01,722.01 cw(c553,722.01) 553,729
  Top Layer w15: 553,729 675,729 cw(c675,716) 688,716 ccw(c701,716) 701,703 D1.A
NetC6_1: C6.1 R14.2 | length 36.6
  Top Layer w20: C6.1@609,284.69 R14.2
NetC6_2: C6.2 C7.1 L1.2 L3.1 | length 154.7
  Top Layer w20: L3.1 C6.2
NetC11_1: C11.1 C15.1 L2.1 R13.2 U5.A2 | length 286.8
  Top Layer w5: L2.1@483,758 L2.1@484,759
  Top Layer w10: U5.A2 288.16,758
  Top Layer w20: 288.16,758 318,758 ; R13.2 318,758 ; L2.1@483,758 C15.1 318,758
NetD1_K: D1.K R17.1 | length 66.3
  Top Layer w15: D1.K R17.1@862,703
NetE2_1: E2.1 L3.2 | length 214.2
  Top Layer w20: L3.2 E2.1@822.81,50.49
SCL: R9.1 SCL.1 U1.20 U4.1 U6.3 | length 2259.5
  Top Layer w5: SCL.1@307,1148.57 SCL.1
  Top Layer w6: v1@307,1034 v1(307,1035) SCL.1@307,1148.57 ; U1.20 699,537.17 ccw(c699,544.83) 704.42,539.42 ; v1@844.75,610 cw(c844.75,606.59) v1(847.16,609)
  Top Layer w15: 704.42,539.42 748.67,583.67 cw(c812.23,520.11) 812.23,610 v1@844.75,610
  Top Layer w20: U4.1@84.66,122 84.66,175.26 ccw(c48.26,175.26) 74,201 cw(c88.49,215.49) 68,215.49 v1(68,300) R9.1 ; U6.3 v1(134,614)
  Bottom Layer w6: 306.29,545.29 309,548
  Bottom Layer w10: 562,573 837,573 ccw(c837,583.16) 847.16,583.16 v1(847.16,609) v1@847.37,609
  Bottom Layer w15: v1(68,300) 68,316 cw(c82,316) 82,330 144,330 ccw(c144,391) 205,391 205,516 ; 306.29,545.29 cw(c235.58,616) 235.58,516 205,516 ; v1(307,1035) 307,955 cw(c271,955) 271,919 ccw(c271,887) 239,887 239,793 cw(c197,793) 197,751 164,751 ccw(c164,721) 134,721 v1(134,614) ccw(c134,613) 133,613 133,575 ccw(c161.19,575) 161.19,546.81 174.19,546.81 cw(c174.19,516) 205,516 ; 309,548 cw(c369.36,487.64) 369.36,573 562,573
SDA: R10.1 SDA.1 U1.19 U4.6 U6.2 | length 2985.8
  Top Layer w5: SDA.1@436,1148.86 SDA.1
  Top Layer w6: v1(436,1035) SDA.1@436,1148.86 ; U1.19 704.47,521.43 ccw(c704.47,557.53) 730,532 739.25,541.25
  Top Layer w10: U6.2 v1(179,499)
  Top Layer w15: 739.25,541.25 cw(c799,481.5) 799,566 830,566 ccw(c830,611) 875,611 v1(875,658.05)
  Top Layer w20: R10.1@103,240 R10.1 103.63,213.37 ccw(c137,213.37) v1(137,180) 161.92,155.08 cw(c148.84,142) 167.34,142 U4.6@167.34,122
  Bottom Layer w6: 765,593 ccw(c765,648.53) 804.26,609.26 837.53,642.53 cw(c875,605.06) v1(875,658.05)
  Bottom Layer w15: v1(179,499) 179,419 cw(c136,419) 136,376 77,376 ccw(c77,326) 27,326 27,212 ccw(c59,212) 59,180 v1(137,180) 137,207.2 cw(c184.28,207.2) 150.85,240.63 175.61,265.39 295.71,383.71 ccw(c225,454.42) 325,454.42 325,500 cw(c377,500) 377,552 840,552 ccw(c840,587) 875,587 v1(875,658.05) ; v1(436,1035) 436,978.42 ccw(c536,978.42) 465.29,907.71 515.71,857.29 cw(c445,786.58) 545,786.58 545,660 ccw(c612,660) 612,593 765,593
SWD_CLK: SWD_CLK.1 U1.27 | length 717
  Top Layer w5: SWD_CLK.1 SWD_CLK.1@565,1148.86
  Top Layer w6: v1@565,1034 v1(565,1035) SWD_CLK.1@565,1148.86 ; U1.27 699.09,647.41
  Top Layer w10: 699.09,647.41 ccw(c699.09,669.91) 715,654 cw(c729.49,639.51) 729.49,660 v1(755,660)
  Bottom Layer w15: v1(565,1035) 565,931 ccw(c588,931) 588,908 cw(c588,880) 616,880 616,715 ccw(c671,715) 671,660 v1(755,660)
SWD_DATA: SWD_DATA.1 U1.26 | length 724.1
  Top Layer w5: SWD_DATA.1 SWD_DATA.1@695,1147.57
  Top Layer w6: U1.26 713.92,631.66 ; v1@695,1034 v1(695,1035) SWD_DATA.1@695,1147.57
  Top Layer w10: 713.92,631.66 cw(c713.92,608.92) 730,625 ccw(c737.24,632.24) 737.24,622 v1(755,622)
  Bottom Layer w15: v1(695,1035) 695,784 ccw(c723,784) 723,756 754.09,756 cw(c754.09,703.09) 807,703.09 807,657.83 cw(c771.17,657.83) 771.17,622 v1(755,622)
V_BATT: C4.1 C5.1 C16.1 C19.1 J8.1 R13.1 R16.1 U5.A1 U5.B1 V_BATT.1 | length 1332.5
  Top Layer w5: 239,892 239.16,892 ; 258.84,892 259,892
  Top Layer w6: V_BATT.1@50,1150 50,1050.9 ccw(c73.9,1050.9) 57,1034 cw(c25.62,1002.62) 70,1002.62 J8.1@70,892
  Top Layer w10: R16.1@238,526.5 v1(238,563) ; U5.B1 239.16,825 ; U5.A1 258.84,824
  Top Layer w20: J8.1@70,892 239,892 ; 239.16,892 258.84,892 ; 259,892 v1(284,892) 318,892 ; R13.1 318,892 ; C19.1@480,819 C5.1@480,914 ; C4.1 C5.1 C5.1@480,914 ; 318,892 359,892 368.86,892 ccw(c368.86,926.14) 393,902 cw(c421.97,873.03) 421.97,914 444,914 C5.1@480,914
  Bottom Layer w15: v1(238,563) 238,731 239,732 cw(c258,732) 258,751 ccw(c258,777) 284,777 v1(284,892)
VCC: C1.1 C2.1 C3.1 C10.1 C12.1 C13.1 C14.1 C18.1 L2.2 R9.2 R10.2 R12.1 R15.1 U1.1 U1.10 U1.14 U1.36 U1.46 U4.5 U6.4 VCC.1 | length 4314.3
  Top Layer w5: VCC.1@177,1147.29 VCC.1 ; 195.68,92 ccw(c195.68,95.28) 198,92.96
  Top Layer w6: R9.2@141.75,300 ccw(c142.75,300) 142,299.34 ccw(c142.75,300) R9.2@142.75,299 ; U4.5 195.68,92 ; v1@177,1034 VCC.1@177,1147.29 ; C1.1@300,93.96 C1.1@301.46,92.5 ; 341,615.91 U1.46 ; 420.77,390 ccw(c420.77,405) 435.77,405 U1.1 ; L2.2 cw(c520.02,748.76) 530.26,748.76 U1.36 ; v1(563,380) 568,380 ccw(c568,389.5) 577.5,389.5 U1.10 ; U1.14 640.5,392.5 ccw(c653,392.5) 653,380 v1(671,380)
  Top Layer w15: v1(69.54,642) 175.96,642 cw(c175.96,583.96) 217,625 ccw(c238.94,646.94) 238.94,615.91 341,615.91 ; R9.2@142.75,299 v1(299,299) v1@300,299
  Top Layer w20: v1(69,426) 118.1,426 cw(c118.1,402.1) 135,419 cw(c118.1,402.1) 142,402.1 R12.1 142,299.34 R10.2@142,239 ; U6.4@69.54,572.4 v1(69.54,642) C12.1@69.54,718 ; R10.2@141.75,239 R10.2@142,239 ; 198,92.96 C1.1@300,92.96 ; C10.1 248,159 ccw(c161.09,159) 222.54,220.46 ccw(c177.77,175.69) 177.77,239 R10.2@142,239 ; C1.1@300,93.96 300,299 300,333 cw(c357,333) 357,390 420.77,390 ; C1.1@301.46,92.5 R15.1@406.63,92.5 ; L2.2 C2.1 920,759 cw(c920,729) 950,729 950,406 cw(c886,406) 886,342 685,342 cw(c685,356) 671,356 v1(671,380)
  Bottom Layer w6: v1@69,640.69 cw(c70.85,640.69) v1(69.54,642) cw(c70.85,643.31) v1@69,643.31
  Bottom Layer w15: v1(299,299) 405.83,299 ccw(c405.83,324.17) 431,324.17 431,352 cw(c459,352) 459,380 v1(563,380) v1(671,380)
  Bottom Layer w20: v1(69,426) v1@69,640.69 ; v1@69,643.31 69,806.65 cw(c122,806.65) 122,859.65 135.65,859.65 ccw(c135.65,902) 178,902 178,930.17 ccw(c177,930.17) 177,931.17 v1(177,1035)
VCCD: C20.1 U1.56 | length 132.3
  Top Layer w6: C20.1@268,458.43 U1.56
VREF: C22.1 U1.45 | length 100.9
  Top Layer w6: C22.1 341.93,645 cw(c341.93,627.93) 354,640 ccw(c374.13,660.13) 374.13,631.66 U1.45
XRES: C21.1 R15.2 U1.4 XRES.1 | length 2055.4
  Top Layer w5: XRES.1 XRES.1@823,1148.29
  Top Layer w6: C21.1 ccw(c442.59,51.41) 446,51.41 R15.2 ccw(c447,92) 447,91 v1(480,91) 480,99 cw(c517.56,99) 491,125.56 ccw(c469.27,147.29) 500,147.29 500,165.99 cw(c599.01,165.99) 529,236 ccw(c495.2,269.8) 543,269.8 543,383 ccw(c530,383) 530,396 491,396 cw(c491,403.98) 483.02,403.98 U1.4 ; v1@823,1034 v1(823,1035) XRES.1@823,1148.29
  Bottom Layer w15: v1(480,91) 480,113.96 ccw(c421.96,113.96) 463,155 442.14,175.86 cw(c476.28,210) 428,210 428,241.96 cw(c486.04,241.96) 445,283 487.67,325.67 cw(c544,269.33) 544,349 882.06,349 ccw(c882.06,430.94) 940,373 ccw(c915.86,397.14) 950,397.14 950,560.99 ccw(c850.99,560.99) 921,631 cw(c959.08,669.08) 905.23,669.08 905.23,862.77 ccw(c877,862.77) 877,891 cw(c877,945) 823,945 v1(823,1035)
XTAL_HF_N: J14.1 U1.17 Y3.3 | length 177.2
  Top Layer w7.5: U1.17 710.34,489.93 ccw(c710.34,505.83) 721.58,494.58 ; 721.59,494.59 733.9,506.9 ; Y3.3@825.38,494.62 cw(c823.07,492.33) Y3.3
  Top Layer w20: 733.9,506.9 cw(c782.42,458.39) 782.42,527
  Top Layer w25: 782.42,527 J14.1 Y3.3@825.37,494.63
XTAL_HF_P: J13.1 U1.16 Y3.1 | length 211.8
  Top Layer w7.5: U1.16 697.82,474.18 cw(c697.82,462) 710,462 ; 710,444 710,444.28 ; Y3.1@817.97,405.97 Y3.1
  Top Layer w15: 710,444.28 710,462
  Top Layer w25: 710,444 J13.1 Y3.1@817.97,405.97
XTAL_LF_N: C9.1 J12.1 U1.3 Y4.2 | length 175.1
  Top Layer w5: 467.27,395 U1.3 ; 479,308 J12.1
  Top Layer w7.5: 467.27,395 ccw(c479.99,395) 470.99,386.01
  Top Layer w10: 470.99,386.01 cw(c451.66,366.68) 479,366.68
  Top Layer w20: C9.1 479,308 Y4.2 479,366.68
XTAL_LF_P: C8.1 J11.1 U1.2 Y4.1 | length 178.4
  Top Layer w5: J11.1 435.6,307 ; C8.1 C8.1@435.6,279 ; 451.52,395 U1.2
  Top Layer w7.5: 449.06,389.06 ccw(c443.12,395) 451.52,395
  Top Layer w10: 435.6,366 cw(c458.78,366) 442.39,382.39 449.06,389.06
  Top Layer w20: C8.1@435.6,279 435.6,307 Y4.1 435.6,366
pads on no net: E2.2 U1.5 U1.6 U1.7 U1.8 U1.21 U1.22 U1.24 U1.25 U1.28 U1.29 U1.30 U1.31 U1.32 U1.33 U1.34 U1.37 U1.38 U1.39 U1.41 U1.42 U1.43 U1.44 U1.47 U1.48 U1.49 U1.50 U1.51 U1.52 U1.53

## Polygon pours and split planes (outlines as drawn)
GND on Top Layer "RF_GND_TOP" (solid, remove dead copper, pour order 1012): 500,0 500,350 1000,350 1000,0
GND on Top Layer "GND_TOP" (hatched 45Degree grid 15 track 5, remove dead copper, pour order 1004): 0,0 0,1200 1000,1200 1000,350 500,350 500,0
GND on Bottom Layer "RF_GND_BOTTOM" (solid, remove dead copper, pour order 1016): 500,0 500,350 1000,350 1000,0
GND on Bottom Layer "GND_BOTTOM" (hatched 45Degree grid 15 track 5, remove dead copper, pour order 1008): 0,0 0,1200 1000,1200 1000,350 500,350 500,0

## Keep-outs
Keep-Out Layer:
  the board outline again, w10

## Other copper
Top Layer:
  rectangle net V_BATT: 239.16,796 259,892
  pour cut-out: 692,545 692,347 880,347 880,545
  pour cut-out: 1000,0 775,0 775,145 1000,145